# Altium PCB PCB_ESP32-C3-DEV_2024-09-22.pcbdoc
Units mil, origin at the board's own origin, x right, y up, seen from the top; angles counter-clockwise.
Board outline 3495 x 2465 mil, 2 copper layers (Top Layer, Bottom Layer); 39 components, 40 nets, 156 pads, 90 vias.
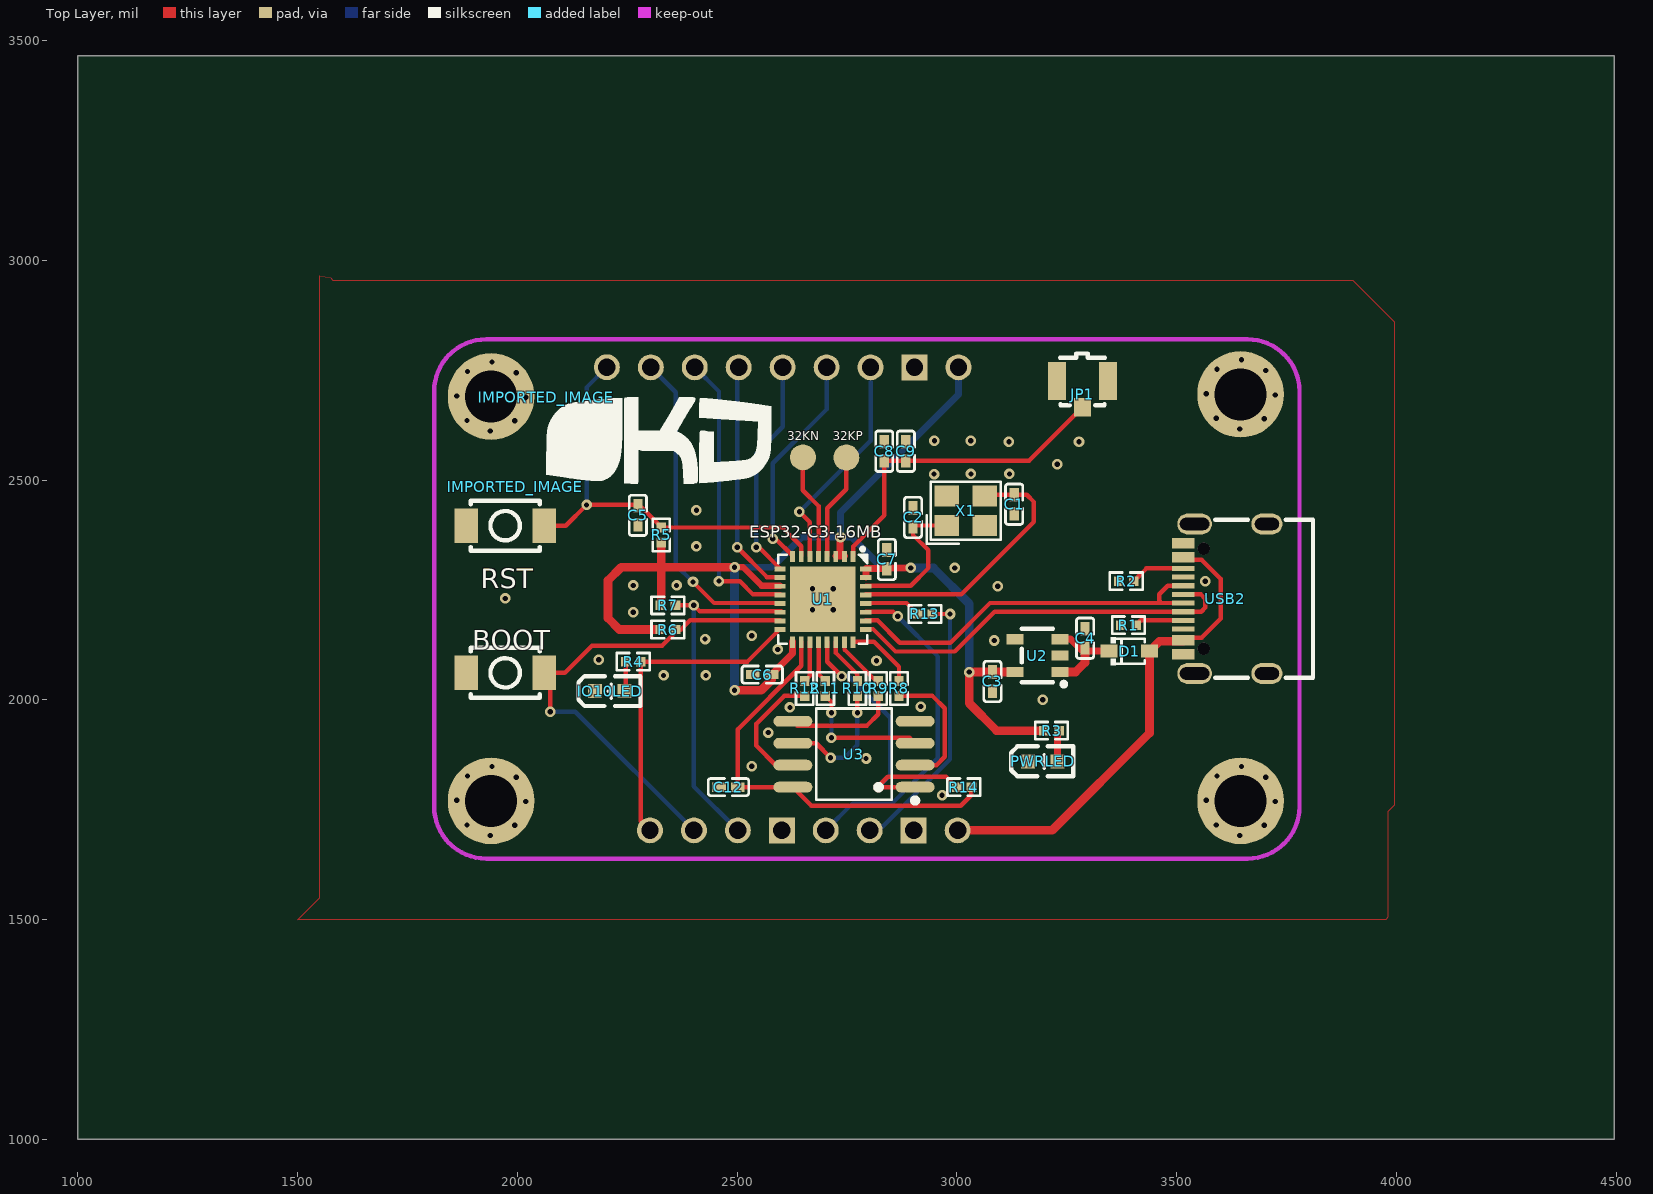
[diagram p0: Top Layer view]
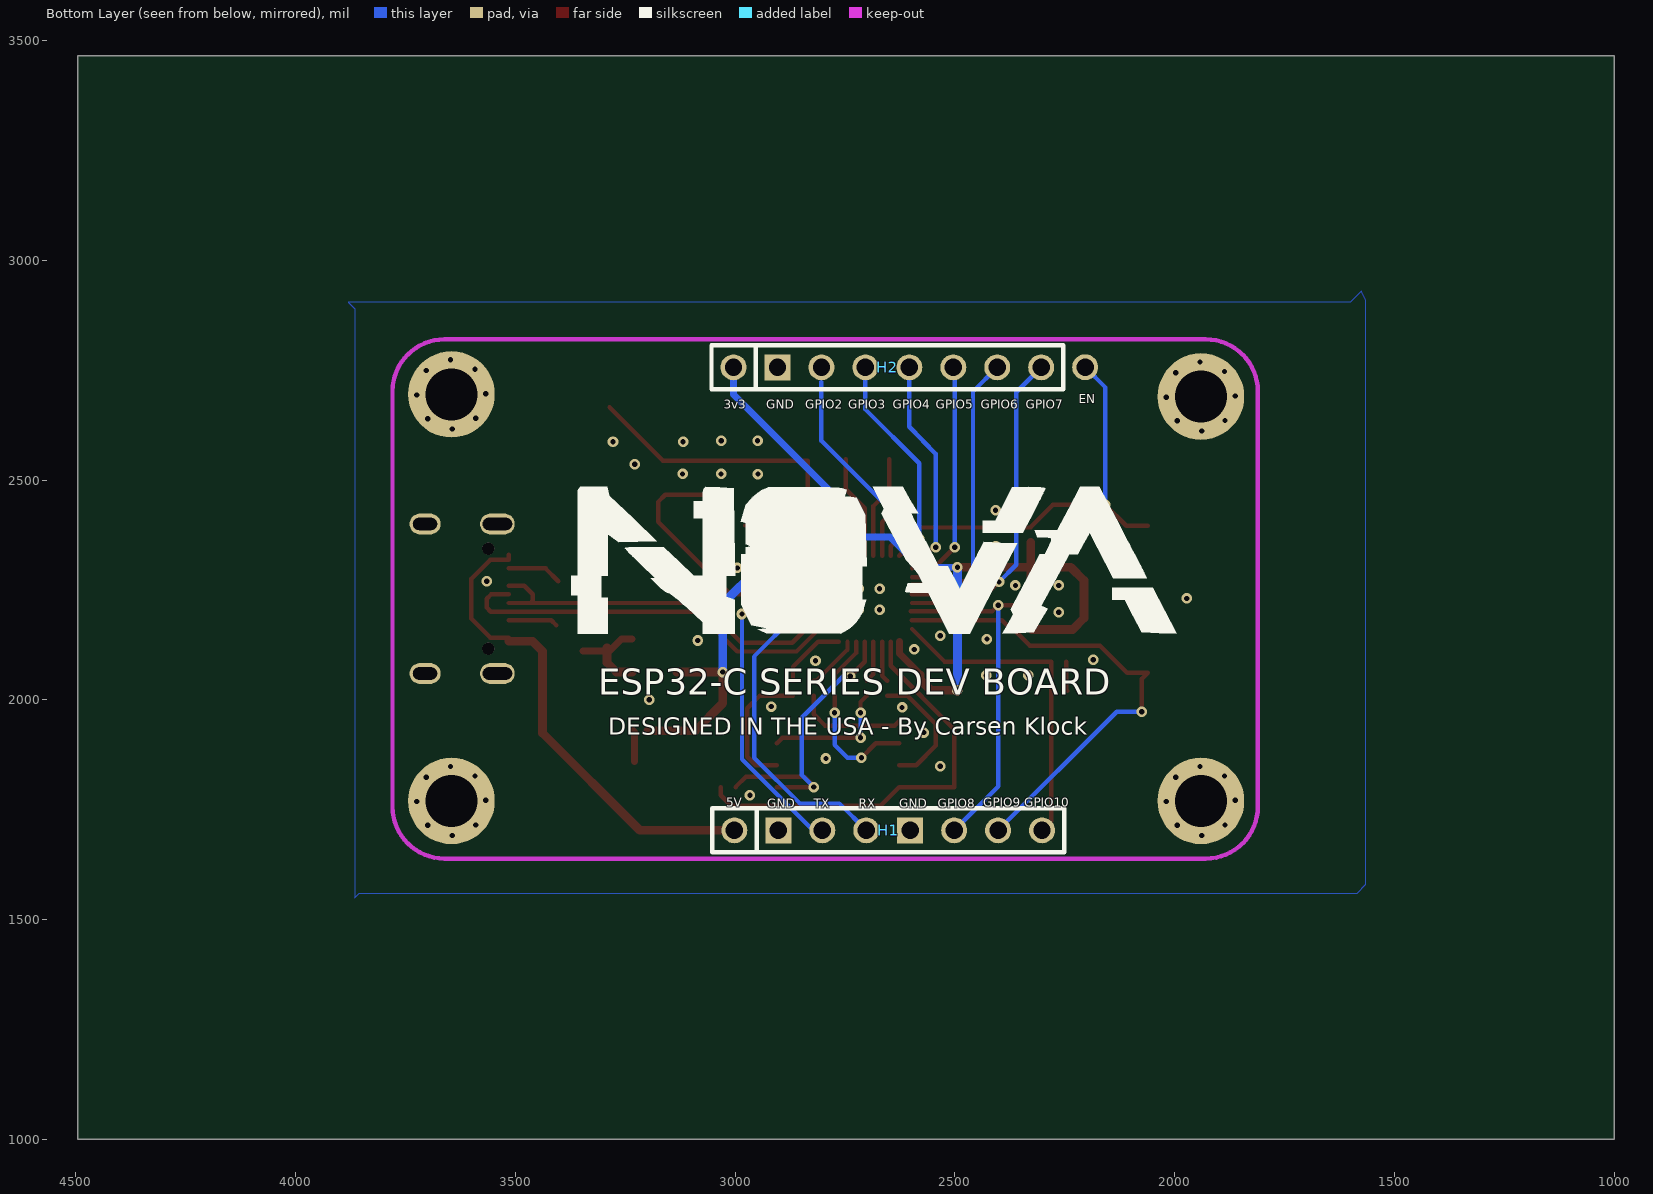
[diagram p1: Bottom Layer view, seen from below]

## Layer stack, top to bottom
Top Layer: signal copper (thickness not stored)
Dielectric: dielectric 12.6, FR-4, Dk 4.8
Bottom Layer: signal copper (thickness not stored)

## Board outline
4495,1000 1000,1000 1000,3465 4495,3465

## Components (designator, comment, footprint, x,y, rotation, side; value= is the part's Value field where it differs from the comment)
BOOT "BOOT" SW-SMD_L3.9-W3.0-P4.45 1972.14,2061.38 r0 top
C1 "22pF" C0402 3130,2445 r90 top
C2 "22pF" C0402 2900,2415 r270 top
C3 "1uF" C0402 3080.69,2041.69 r90 top
C4 "1uF" C0402 3291.37,2140.14 r270 top
C5 "100nF" C0402_NEW 2274.16,2419.7 r270 top
C6 "100nF" C0402_NEW 2556.93,2057.44 r180 top
C7 "100nF" C0402_NEW 2840.47,2319.32 r270 top
C8 "3.3pF" C0402 2834.56,2565.45 r270 top
C9 "1.2pF" C0402 2883.79,2565.45 r270 top
C12 "1uF" C0402 2480.14,1801.47 r0 top
D1 "1N5819WS" SOD-323_L1.8-W1.3-LS2.5-RD 3391.79,2110.61 r0 top
H1 "KH-2.54PH180-1X8P-L11.5" HDR-TH_8P-P2.54-V-M#1 2651.45,1703.02 r0 bottom
H2 "KH-2.54PH180-1X8P-L11.5" HDR-TH_8P-P2.54-V-M#2 2653.41,2756.44 r0 bottom
IMPORTED_IMAGE "IMPORTED_IMAGE" IMPORTED_IMAGE 1995.07,2484.74 r0 top
IMPORTED_IMAGE "IMPORTED_IMAGE" IMPORTED_IMAGE 2065.37,2688.03 r0 top
IO10LED "19-217/BHC-ZL1M2RY/3T" LED0603-R-RD_BLUE 2210.39,2020.03 r0 top
JP1 "U.FL-R-SMT-1(80)" RF-SMD_FRF05002-JSS103M 3285.46,2695.4 r0 top
PWRLED "KT-0603R" LED0603-R-RD 3195,1860 r0 top
R1 "5.1K" R0402 3390,2170 r0 top
R2 "5.1K" R0402 3385,2270 r180 top
R3 "1kΩ" R0402 3215,1930 r0 top
R4 "1kΩ" R0402 2263.55,2086.98 r180 top
R5 "10kΩ" R0402 2327.31,2374.96 r90 top
R6 "10kΩ" R0402 2342.31,2159.96 r0 top
R7 "10kΩ" R0402 2342.31,2214.96 r0 top
R8 "0Ω" R0402 2868.04,2025.94 r270 top
R9 "0Ω" R0402 2820.78,2025.94 r270 top
R10 "0Ω" R0402 2773.52,2025.94 r270 top
R11 "0Ω" R0402 2700.67,2025.94 r270 top
R12 "0Ω" R0402 2653.41,2025.94 r270 top
R13 "510Ω" R0402 2927.11,2195.27 r0 top
R14 "10kΩ" R0402 3015.71,1801.47 r0 top
RST "RST" SW-SMD_L3.9-W3.0-P4.45 1972.14,2396.11 r0 top
U1 "ESP32-C3" QFN-32_L5.0-W5.0-P0.50-TL-EP3.7 2694.76,2228.75 r270 top
U2 "XC6210B332MR" SOT-23-5_L3.0-W1.7-P0.95-LS2.8-BR 3183.08,2100.76 r0 top
U3 "W25Q128JVSIQTR" SOIC-8_L5.3-W5.3-P1.27-LS8.0-BL 2765.65,1876.3 r90 top
USB2 "KH-TYPE-C-16P" USB-C-SMD_KH-TYPE-C-16P 3609.98,2229.96 r90 top
X1 "40MHz" CRYSTAL-SMD_4P-L3.2-W2.5-BL 3020,2430 r0 top

## Footprints (in the part's own frame and the unit in brackets; to place one, negate y for a bottom-side part, rotate by r counter-clockwise, add the part's x,y. Pads: shape width x height; smd on the part's side, far side on the other; paste and mask are expansions set on the pad)
C0402 [mm]
  rect 0.79x0.54 smd paste-100 mask+0.051: 1(-0.545,0) 2(0.545,0)
  silkscreen extent -1.17,-0.5 1.17,0.5
C0402_NEW [mm]
  rect 0.79x0.54 smd paste-100 mask+0.051: 1(-0.545,0) 2(0.545,0)
  silkscreen extent -1.17,-0.5 1.17,0.5
CRYSTAL-SMD_4P-L3.2-W2.5-BL [mm]
  rect 1.4x1.2 smd paste+0 mask+0.051: 1(-1.1,-0.85) 2(1.1,-0.85) 3(1.1,0.85) 4(-1.1,0.85)
  silkscreen extent -2.26,-1.91 2.03,1.68
HDR-TH_8P-P2.54-V-M#1 [mm]
  round 1.5 hole 1 paste+0 mask+0.051: 1(8.89,0) 3(3.81,0) 4(1.27,0) 6(-3.81,0) 7(-6.35,0) 8(-8.89,0)
  rect 1.5x1.5 hole 1 paste+0 mask+0.051: 2(6.35,0) 5(-1.27,0)
  silkscreen extent -10.16,-1.27 10.16,1.27
HDR-TH_8P-P2.54-V-M#2 [mm]
  round 1.5 hole 1 paste+0 mask+0.051: 1(8.89,0) 3(3.81,0) 4(1.27,0) 5(-1.27,0) 6(-3.81,0) 7(-6.35,0) 8(-8.89,0)
  rect 1.5x1.5 hole 1 paste+0 mask+0.051: 2(6.35,0)
  silkscreen extent -10.16,-1.27 10.16,1.27
IMPORTED_IMAGE [mil]
LED0603-R-RD [mm]
  rect 0.8x0.8 smd paste+0 mask+0.051: 1(0.851,0) 2(-0.851,0)
  silkscreen extent -1.82,-0.86 1.77,0.86
LED0603-R-RD_BLUE [mm]
  rect 0.8x0.8 smd paste+0 mask+0.051: 1(0.851,0) 2(-0.851,0)
  silkscreen extent -1.82,-0.86 1.77,0.86
QFN-32_L5.0-W5.0-P0.50-TL-EP3.7 [mm]
  rect 0.65x0.28 smd paste-100 mask+0.051: 1(-2.478,1.75) 2(-2.478,1.25) 3(-2.478,0.75) 4(-2.478,0.25) 5(-2.478,-0.25) 6(-2.478,-0.75) 7(-2.478,-1.25) 8(-2.478,-1.75) 17(2.478,-1.75) 18(2.478,-1.25) 19(2.478,-0.75) 20(2.478,-0.25) 21(2.478,0.25) 22(2.478,0.75) 23(2.478,1.25) 24(2.478,1.75)
  rect 0.28x0.65 smd paste-100 mask+0.051: 9(-1.75,-2.478) 10(-1.25,-2.478) 11(-0.75,-2.478) 12(-0.25,-2.478) 13(0.25,-2.478) 14(0.75,-2.478) 15(1.25,-2.478) 16(1.75,-2.478) 25(1.75,2.478) 26(1.25,2.478) 27(0.75,2.478) 28(0.25,2.478) 29(-0.25,2.478) 30(-0.75,2.478) 31(-1.25,2.478) 32(-1.75,2.478)
  rect 3.8x3.8 smd paste-100 mask+0.051: 33(0,0)
  silkscreen extent -3,-2.58 2.58,2.58
R0402 [mm]
  rect 0.566x0.54 smd paste-100 mask+0.051: 1(-0.433,0) 2(0.433,0)
  silkscreen extent -0.94,-0.5 0.94,0.5
RF-SMD_FRF05002-JSS103M [mm]
  rect 1x1.05 smd paste+0 mask+0.05: 1(0,-0.762)
  rect 1.05x2.2 smd paste+0 mask+0.05: 2(-1.475,0.762) 3(1.475,0.762)
  silkscreen extent -1.3,-0.63 1.3,2.35
SOD-323_L1.8-W1.3-LS2.5-RD [mm]
  rect 1x0.75 smd paste+0 mask+0.051: 1(-1.173,0) 2(1.173,0)
  silkscreen extent -1.08,-0.8 0.9,0.8
SOIC-8_L5.3-W5.3-P1.27-LS8.0-BL [mm]
  oval 0.63x2.25 smd paste+0 mask+0.051: 1(-1.905,-3.53) 2(-0.635,-3.53) 3(0.635,-3.53) 4(1.905,-3.53) 5(1.905,3.53) 6(0.635,3.53) 7(-0.635,3.53) 8(-1.905,3.53)
  silkscreen extent -2.82,-3.68 2.64,2.18
SOT-23-5_L3.0-W1.7-P0.95-LS2.8-BR [mm]
  rect 1x0.6 smd paste+0 mask+0.051: 1(1.3,-0.95) 2(1.3,0) 3(1.3,0.95) 4(-1.3,0.95) 5(-1.3,-0.95)
  silkscreen extent -0.9,-1.78 1.65,1.55
SW-SMD_L3.9-W3.0-P4.45 [mm]
  rect 1.35x2 smd paste+0 mask+0.102: 1(-2.25,0) 2(2.25,0)
  silkscreen extent -2,-1.45 2,1.45
USB-C-SMD_KH-TYPE-C-16P [mm]
  oval 1.2x2 hole 0.7 slot 1.7 at 90 deg paste+0 mask+0.051: 1(-4.32,1.765) 2(4.32,1.765)
  oval 1.2x1.8 hole 0.7 slot 1.4 at 90 deg paste+0 mask+0.051: 3(-4.32,-2.415) 4(4.32,-2.415)
  rect 0.3x1.3 smd paste-100 mask+0.05: A1(-3.35,2.415) A4(-2.55,2.415) A5(-1.25,2.415) A6(-0.25,2.415) A7(0.25,2.415) A8(1.25,2.415) A9(2.55,2.415) A12(3.35,2.415) B1(3.05,2.415) B4(2.25,2.415) B5(1.75,2.415) B6(0.75,2.415) B7(-0.75,2.415) B8(-1.75,2.415) B9(-2.25,2.415) B12(-3.05,2.415)
  round 0.7 hole 0.7 unplated paste+0: ""(-2.89,1.235) ""(2.89,1.235)
  silkscreen extent -4.57,-5.08 4.57,0.57

## Free pads (board coordinates)
  round 196.85 hole 118.11 paste+0 mask+2: 1(1940,1770) 1(1940,2690) 1(3645,1770) 1(3645,2695)
  round 59.05 smd paste+0 mask+2: 2(2649.48,2551.66) 2(2748.33,2551.23)
  round 59.05 hole 39.37 paste+0 mask+2: 8(2203.4,2756.6)

## Via types
v1: diameter 24, hole 12, Top Layer to Bottom Layer, tented both sides, 90 vias

## Nets (pads, with @x,y where several pads share a name; then routed paths per layer and width w, separated by ;. In a path a pad name is that pad's centre, name@x,y a point inside that pad or via, vN(x,y) a via of type N, cw(c..) or ccw(c..) an arc to the next point about the centre after c; other vN are vias at no path point)
32K_N: pad.2@2649.48,2551.66 U1.5 | length 235.1
  Top Layer w10: 2649.3,2476.8 pad.2@2649.5,2547.7 ; 2649.28,2476.84 2685.16,2440.96 U1.5@2685.16,2327.54
32K_P: pad.2@2748.33,2551.23 U1.4 | length 238.1
  Top Layer w10: U1.4@2704.84,2327.54 2704.84,2435.52 2748.13,2478.81 ; pad.2@2747.9,2547.7 2748.1,2478.8
+5V: D1.2 H1.1 USB2.A4 USB2.A9 USB2.B4 USB2.B9 | length 1120.5
  Top Layer w10: USB2.A4 USB2.B9 3556.4,2141.4 3600,2185 3600,2275 3556.4,2318.6 USB2.B4@3514.9,2318.6 ; USB2.B4 USB2.A9
  Top Layer w19.68: H1.1 3216.5,1703 3438,1924.5 D1.2 3460.3,2132.9 USB2.A4@3514.9,2132.9
BOOT: BOOT.2 H1.7 R6.2 U1.15 | length 1125.4
  Top Layer w10: v1(2074.53,1972.78) 2074.53,2047.57 BOOT.2 2108,2061.4 2169.6,2123 2329.1,2123 R6.2@2366.1,2160 ; R6.2@2360,2159.8 2371.9,2159.8 2392.8,2180.8 U1.15@2597.5,2180.8
  Bottom Layer w10: v1(2074.53,1972.78) 2131.69,1972.78 H1.7
D+: U1.26 USB2.A6 USB2.B6 | length 915.6
  Top Layer w10: U1.26@2792.5,2180.8 2819.2,2180.8 2870,2130 2985,2130 3075.2,2220.2 3514.9,2220.2 3465.2,2220.2 3460,2225 3460,2240 3479.5,2259.5 USB2.B6
D-: U1.25 USB2.A7 USB2.B7 | length 909.2
  Top Layer w10: U1.25@2792.5,2161.1 2808.9,2161.1 2860,2110 2995,2110 3085.5,2200.5 3514.9,2200.5 3555.5,2200.5 3565,2210 3565,2230 3555.2,2239.8 USB2.A7
EN: C5.1 pad.8 R5.2 RST.2 U1.7 | length 995.6
  Top Layer w10: RST.2 2110,2396.1 v1(2157.3,2443.4) C5.1@2273.4,2443.4 ; C5.1@2277.34,2443.37 R5.2@2328.53,2392.17 ; R5.2@2326.56,2392.17 2602.96,2392.04 2645.79,2349.21 U1.7@2645.79,2327.54
  Bottom Layer w10: v1(2157.3,2443.4) 2157.3,2710.5 pad.8
FLASH: C12.2 R14.2 U1.18 U3.8 | length 967.8
  Top Layer w10: U3.8 2501.78,1801.29 C12.2 2501.6,1933.2 2645.8,2077.4 U1.18@2645.8,2132.5 ; U3.8 2668.8,1759.1 3008.8,1759.1 3032.7,1783.1 R14.2@3032.7,1801.5
GND: BOOT.1 C1.1 C2.1 C3.1 C4.1 C5.2 C6.2 C7.1 C8.1 C9.1 C12.1 H1.2 H1.5 H2.2 IO10LED.2 JP1.2 JP1.3 pad.1 PWRLED.2 R1.1 R2.2 RST.1 U1.33 U2.2 U3.4 USB2.1 USB2.2 USB2.3 USB2.4 USB2.A1 USB2.A12 USB2.B1 USB2.B12 X1.2 X1.4
  other v1: 1938.28,1691.31 3643.28,1691.31 1885.09,1715.35 1994.23,1714.56 3590.09,1715.35 3699.23,1714.56 2019.05,1768.54 3724.05,1768.54 1861.85,1771.29 3566.85,1771.29 2966.14,1782.75 1997.38,1824.09 3702.38,1824.09 1886.28,1826.85 3591.28,1826.85 1942.22,1848.52 2533.31,1848.73 3647.22,1848.52 2793.21,1866.45 2570.72,1925.52 2619.94,1982.62 2917.26,1984.59 3195,2000 2332.47,2055.47 2428.95,2055.47 2816.84,2088.95 2184.79,2090.92 2592.38,2114.54 3085,2135 2426.98,2138.17 2533.31,2146.05 2263.55,2199.21 2671.14,2205.13 2718.38,2205.13 1972.14,2230.71 2671.14,2252.37 2718.38,2252.37 3092.5,2258.28 2263.55,2260.25 2362,2260.25 3565,2270 2995,2300 2407.29,2348.85 2407.29,2431.55 2947.87,2513.48 3031.72,2513.84 3119.3,2513.84 3228.36,2535.91 3118.1,2587.1 3277.59,2587.1 2948.77,2589.07 3031.46,2589.07 1938.28,2611.31 3643.28,2616.31 1885.09,2635.35 1994.23,2634.56 3590.09,2640.35 3699.23,2639.56 2019.05,2688.54 1861.85,2691.29 3724.05,2693.54 3566.85,2696.29 1997.38,2744.09 1886.28,2746.85 3702.38,2749.09 3591.28,2751.85 1942.22,2768.52 3647.22,2773.52
GPIO2: H2.3 U1.6 | length 472.3
  Top Layer w10: v1(2641.6,2427.61) 2665.47,2403.75 U1.6@2665.47,2327.54
  Bottom Layer w10: v1(2641.6,2427.61) 2803.42,2589.43 2803.42,2722.96
GPIO3: H2.4 U1.8 | length 502.4
  Top Layer w10: v1(2580.56,2366.58) 2587.06,2366.58 U1.8@2626.1,2327.54
  Bottom Layer w10: v1(2580.56,2366.58) 2580.6,2537.9 2703.4,2660.7 H2.4
GPIO4: H2.5 U1.9 | length 508.2
  Top Layer w10: v1(2543.15,2346.89) 2549.47,2346.89 U1.9@2597.46,2298.9
  Bottom Layer w10: v1@2543.1,2346.9 2543.1,2559.5 2603.4,2621.4 H2.5
GPIO5: H2.6 U1.10 | length 538.8
  Top Layer w10: v1(2499.83,2346.89) 2567.51,2279.21 U1.10@2597.46,2279.21
  Bottom Layer w10: v1(2499.83,2346.89) 2499.8,2756.4 H2.6
GPIO8: H1.6 R7.2 U1.14 | length 800
  Top Layer w10: R7.2 v1(2401.38,2214.96) 2415.16,2201.18 U1.14@2600.25,2201.18
  Bottom Layer w10: v1(2401.38,2214.96) 2401.38,1803.02 H1.6
GPIO10: H1.8 R4.1 U1.16 | length 740.2
  Top Layer w10: H1.8 2280.6,1723.9 R4.1 2523.34,2086.98 U1.16@2597.46,2161.1
IO10LED_1: IO10LED.1 R4.2 | length 68
  Top Layer w10: IO10LED.1 2246.51,2022.65 R4.2
PWRLED_1: PWRLED.1 R3.2 | length 71.5
  Top Layer w15.75: PWRLED.1 3228.5,1926.46 R3.2
RX: H1.4 U1.27 | length 760
  Top Layer w10: U1.27@2792.54,2200.47 2854.53,2200.47 v1(2865,2190)
  Bottom Layer w10: H1.4 2762.5,1764.1 2852.3,1764.1 2956.6,1868.4 2956.6,2098.4 v1(2865,2190)
SCL: H2.8 U1.13 | length 746
  Top Layer w10: v1(2399.41,2268.13) 2447.38,2220.16 U1.13@2597.46,2220.16
  Bottom Layer w10: H2.8 2360.03,2699.82 2360.03,2307.51 v1(2399.41,2268.13)
SDA: H2.7 U1.12 | length 660.7
  Top Layer w10: v1(2458.48,2270.09) 2505.7,2270.1 2536,2239.8 U1.12@2597.5,2239.8
  Bottom Layer w10: H2.7 2458.48,2701.37 v1(2458.48,2270.09)
SPICLK: R10.2 U3.6 | length 283.6
  Top Layer w10: U3.6 2679.61,1901.3 v1(2712.48,1868.42) ; v1(2773.52,1970.81) R10.2
  Bottom Layer w10: v1(2712.48,1868.42) 2744,1868.4 2773.5,1898 v1(2773.52,1970.81)
SPICS0: R14.1 U1.21 U3.1 | length 693.5
  Top Layer w10: U1.21@2704.8,2132.5 2704.8,2086.78 v1(2738.08,2053.5) ; U3.1 v1(2820.78,1801.47) 2820.8,1803.4 2842.4,1825.1 2975,1825.1 R14.1
  Bottom Layer w10: v1(2738.08,2053.5) 2753.83,2053.51 2848.35,1958.99 2848.35,1829.04 v1(2820.78,1801.47)
SPID: R9.2 U3.5 | length 250.8
  Top Layer w10: U3.5 2636.7,1941.3 2795.2,1941.3 2820.8,1966.9 R9.2
SPIHD: R12.2 U3.7 | length 287.9
  Top Layer w10: U3.7 2587.85,1851.29 2543.15,1895.98 2543.15,1945.21 2606.84,2008.9 R12.2
SPIQ: R8.2 U3.2 | length 302.1
  Top Layer w10: R8.2 2944.1,2008.9 2972.4,1980.7 2972.4,1870.4 2953.3,1851.3 U3.2
SPIWP: R11.2 U3.3 | length 296.2
  Top Layer w10: R11.2 2714.45,1995.12 v1(2714.45,1970.81) ; v1(2714.45,1913.71) 2892.2,1913.7 U3.3
  Bottom Layer w10: v1(2714.45,1913.71) v1(2714.45,1970.81)
TX: H1.3 R13.2 | length 620.5
  Top Layer w10: R13.2 v1(2984.21,2195.27)
  Bottom Layer w10: H1.3 2822.8,1703 2984.2,1864.7 v1(2984.21,2195.27)
U1_1: C8.2 C9.2 JP1.1 U1.1 | length 744.9
  Top Layer w10: U1.1@2763.9,2327.54 2763.9,2348.9 2834.56,2419.56 C8.2 C9.2@2881.82,2543.99 ; C9.2 3164.06,2543.99 JP1.1
U1_19: R12.1 U1.19 | length 94.5
  Top Layer w10: R12.1 2665.47,2055.03 U1.19@2665.47,2132.46
U1_20: R11.1 U1.20 | length 95.9
  Top Layer w10: U1.20@2685.16,2132.46 2685.16,2058.49 R11.1
U1_22: R10.1 U1.22 | length 109.8
  Top Layer w10: U1.22@2724.5,2132.5 2724.5,2106.4 2773.5,2057.4 R10.1
U1_23: R9.1 U1.23 | length 124.3
  Top Layer w10: U1.23@2744.2,2132.5 2744.2,2114.3 2815.6,2043 R9.1
U1_24: R8.1 U1.24 | length 160
  Top Layer w10: U1.24@2763.9,2132.5 2810.7,2132.5 2868,2075.2 R8.1
U1_28: R13.1 U1.28 | length 127.9
  Top Layer w10: U1.28@2792.5,2220.2 2885.2,2220.2 R13.1
U1_29: C1.2 U1.29 X1.3 | length 615.7
  Top Layer w10: U1.29@2792.5,2239.8 3009.8,2239.8 3175,2405 3175,2450 3158.5,2466.5 C1.2 ; X1.3 3066.3,2466.46 C1.2
U1_30: C2.2 U1.30 X1.1 | length 345.2
  Top Layer w10: U1.30@2792.54,2259.53 2894.53,2259.53 2935,2300 2935,2340 2900,2375 C2.2 2902.99,2396.53 X1.1
U2_1: C4.2 D1.1 U2.1 U2.3 | length 222.5
  Top Layer w15.75: U2.3 3257.9,2138.2 3285.5,2110.6 D1.1
  Top Layer w19.68: U2.1 3269.72,2063.36 3291.37,2085.01 C4.2
USB2_A5: R1.2 USB2.A5 | length 112.3
  Top Layer w10: R1.2 3417.83,2180.79 USB2.A5@3514.92,2180.79
USB2_B5: R2.1 USB2.B5 | length 124.9
  Top Layer w10: R2.1 3430.94,2298.9 USB2.B5
VCC: C3.2 C6.1 C7.2 H2.1 R3.1 R5.1 R6.1 R7.1 U1.2 U1.3 U1.11 U1.17 U1.31 U1.32 U2.5 | length 3148.5
  Top Layer w13.78: v1(2493.93,2301.6) 2513.6,2301.6 2555.7,2259.5 U1.11@2597.5,2259.5
  Top Layer w15.75: C6.1 2626.1,2105.15 U1.17@2626.1,2132.46 ; v1(2735,2370) 2733.38,2368.38 2733.38,2327.54 2724.53,2327.54 U1.2@2744.21,2327.54 ; U1.31@2792.54,2279.21 2792.54,2298.9 2792.9,2298.54 2840,2298.54 2840,2300 v1(2895,2300)
  Top Layer w19.68: R7.1 2327.31,2217 R5.1 ; R6.1 2231.9,2160 2205.9,2186 2205.9,2271.5 2236,2301.6 2327.3,2301.6 2327.3,2258.9 ; 2327.31,2301.63 v1(2493.93,2301.6) ; v1(2493.93,2022) 2555,2022 2578.4,2045.4 C6.1 ; v1@3028.1,2063.1 3028.1,1991.9 3090,1930 R3.1 ; v1(3028.15,2063.15) C3.2 3080.69,2063.36 U2.5
  Bottom Layer w15.75: v1(2493.93,2301.6) 2578.59,2301.6 2646.99,2370 v1(2735,2370) ; v1(2895,2300) 2830,2300 2760,2370 v1(2735,2370) ; H2.1 3003.4,2694.9 2735,2426.5 v1(2735,2370)
  Bottom Layer w19.68: v1(2493.93,2022) v1(2493.93,2301.6) ; v1(2895,2300) 2946.43,2300 3028.15,2218.28 v1(3028.15,2063.15)
pads on no net: U2.4 USB2. USB2.A8 USB2.B8

## Polygon pours and split planes (outlines as drawn)
GND on Bottom Layer (solid): 1575,2930 1600,2905 3880,2905 3865,2890 3865,1550 3855,1560 1585,1560 1565,1580 1565,2910
GND on Top Layer (solid): 1575,2960 1580,2955 3900,2955 3995,2860 3995,1760 3980,1745 3980,1505 3975,1500 1500,1500 1550,1550 1550,2965

## Keep-outs
Keep-Out Layer:
  lines w10: 1810.59,1757 ccw(c1928.7,1757) 1928.7,1638.89 ; 1810.59,2701.88 cw(c1928.7,2701.88) 1928.7,2819.99 ; 3660.98,1638.89 ccw(c3660.98,1757) 3779.09,1757 ; 3660.98,2819.99 cw(c3660.98,2701.88) 3779.09,2701.88

## Silkscreen, mask and mechanical layers (free items; w line width, h text height)
Top Overlay:
  text "32KN" at 2614.04,2591.05 h19.68
  text "32KP" at 2716.84,2590.59 h19.68
  text "ESP32-C3-16MB" at 2527.4,2368.55 h27.56
Bottom Overlay:
  text "EN" at 2218.11,2674.48 h19.68
  text "GPIO7" at 2338.38,2661.93 h19.68
  text "GPIO6" at 2440.76,2661.93 h19.68
  text "GPIO5" at 2543.15,2661.93 h19.68
  text "GPIO4" at 2641.6,2661.93 h19.68
  text "GPIO3" at 2742.02,2661.93 h19.68
  text "GPIO2" at 2840.47,2661.93 h19.68
  text "GND" at 2929.08,2661.93 h19.68
  text "3v3" at 3025.56,2661.93 h19.68
  text "ESP32-C SERIES DEV BOARD" at 3310.75,2011.27 h59.05
  text "DESIGNED IN THE USA - By Carsen Klock" at 3288.54,1920.48 h39.37
  text "GPIO10" at 2342.31,1756.19 h19.68
  text "GPIO9" at 2434.86,1756.19 h19.68
  text "5V" at 3019.65,1756.19 h19.68
  text "GPIO8" at 2539.21,1754.22 h19.68
  text "GND" at 2625.85,1754.22 h19.68
  text "RX" at 2718.39,1754.22 h19.68
  text "TX" at 2820.78,1754.22 h19.68
  text "GND" at 2927.11,1754.22 h19.68